# Altium PCB mainPCB.PcbDoc
Units mil, origin at the board's own origin, x right, y up, seen from the top; angles counter-clockwise.
Board outline 1968.5 x 3937.01 mil, 2 copper layers (Top Layer, Bottom Layer); 26 components, 22 nets, 73 pads, 0 vias.
Unrouted connection lines stored in the file: 2.
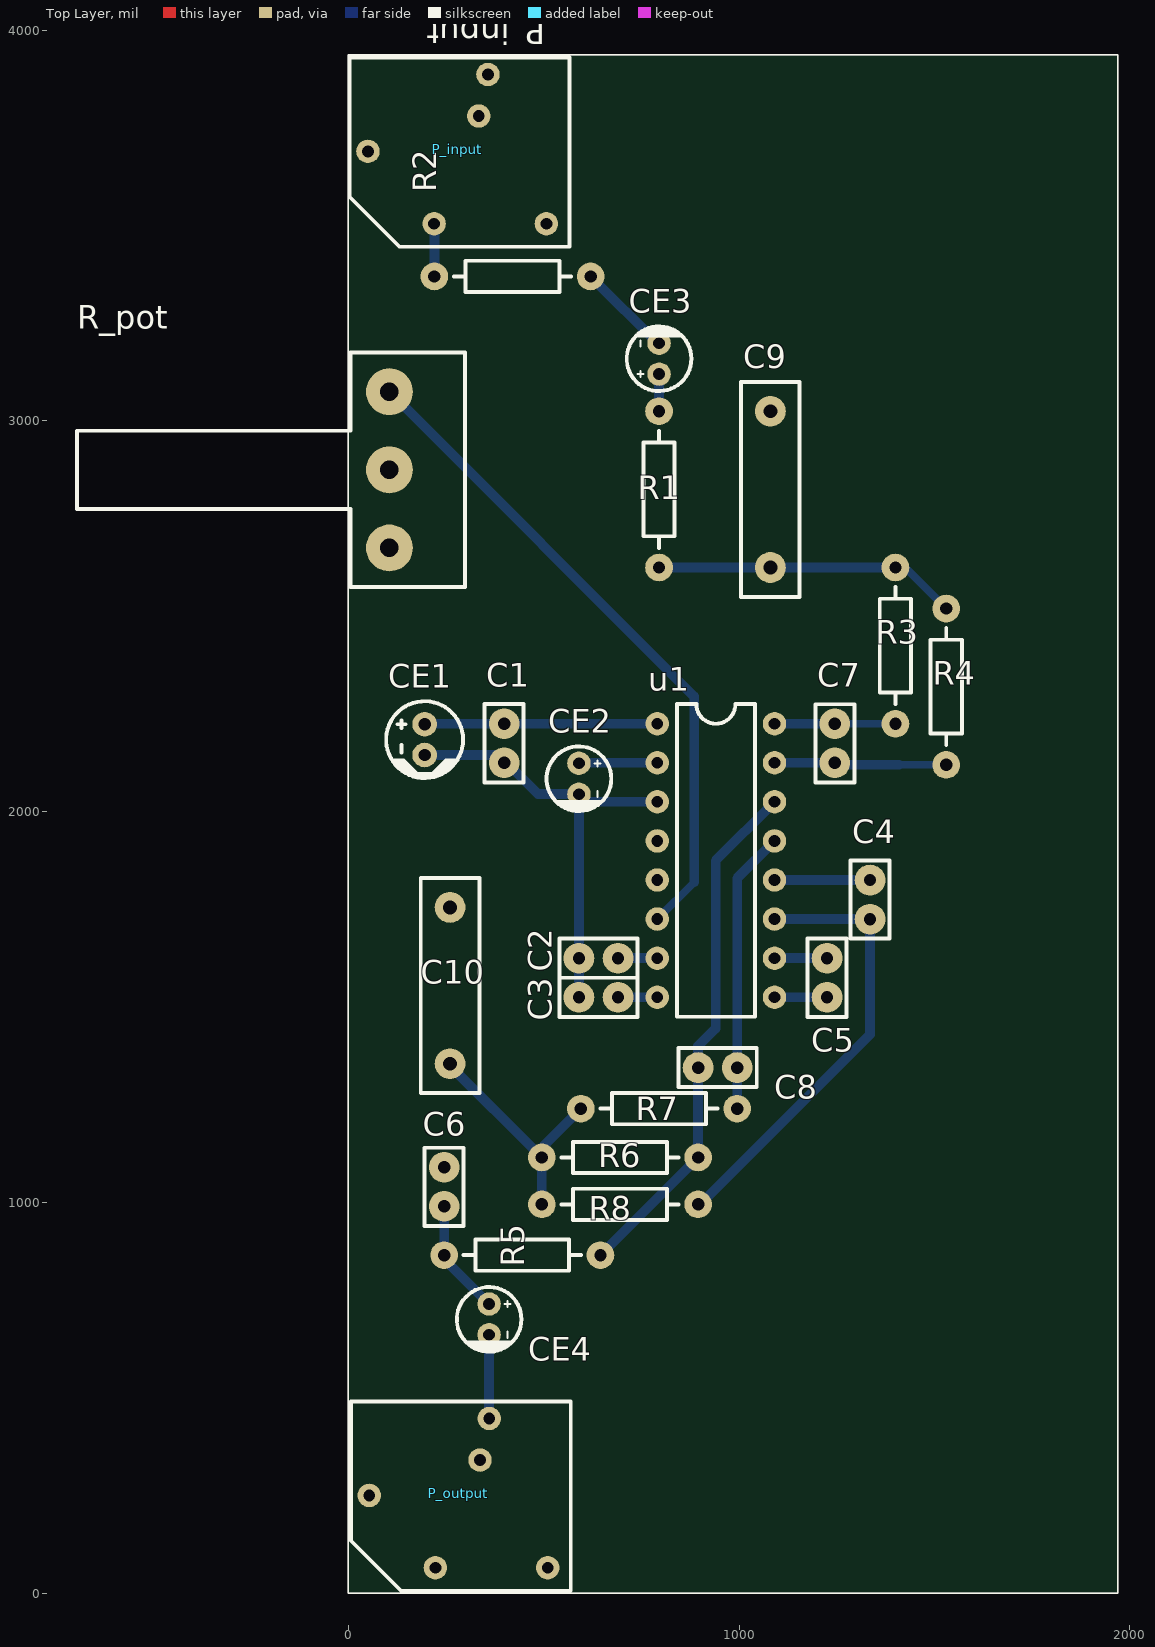
[diagram p0: Top Layer view]
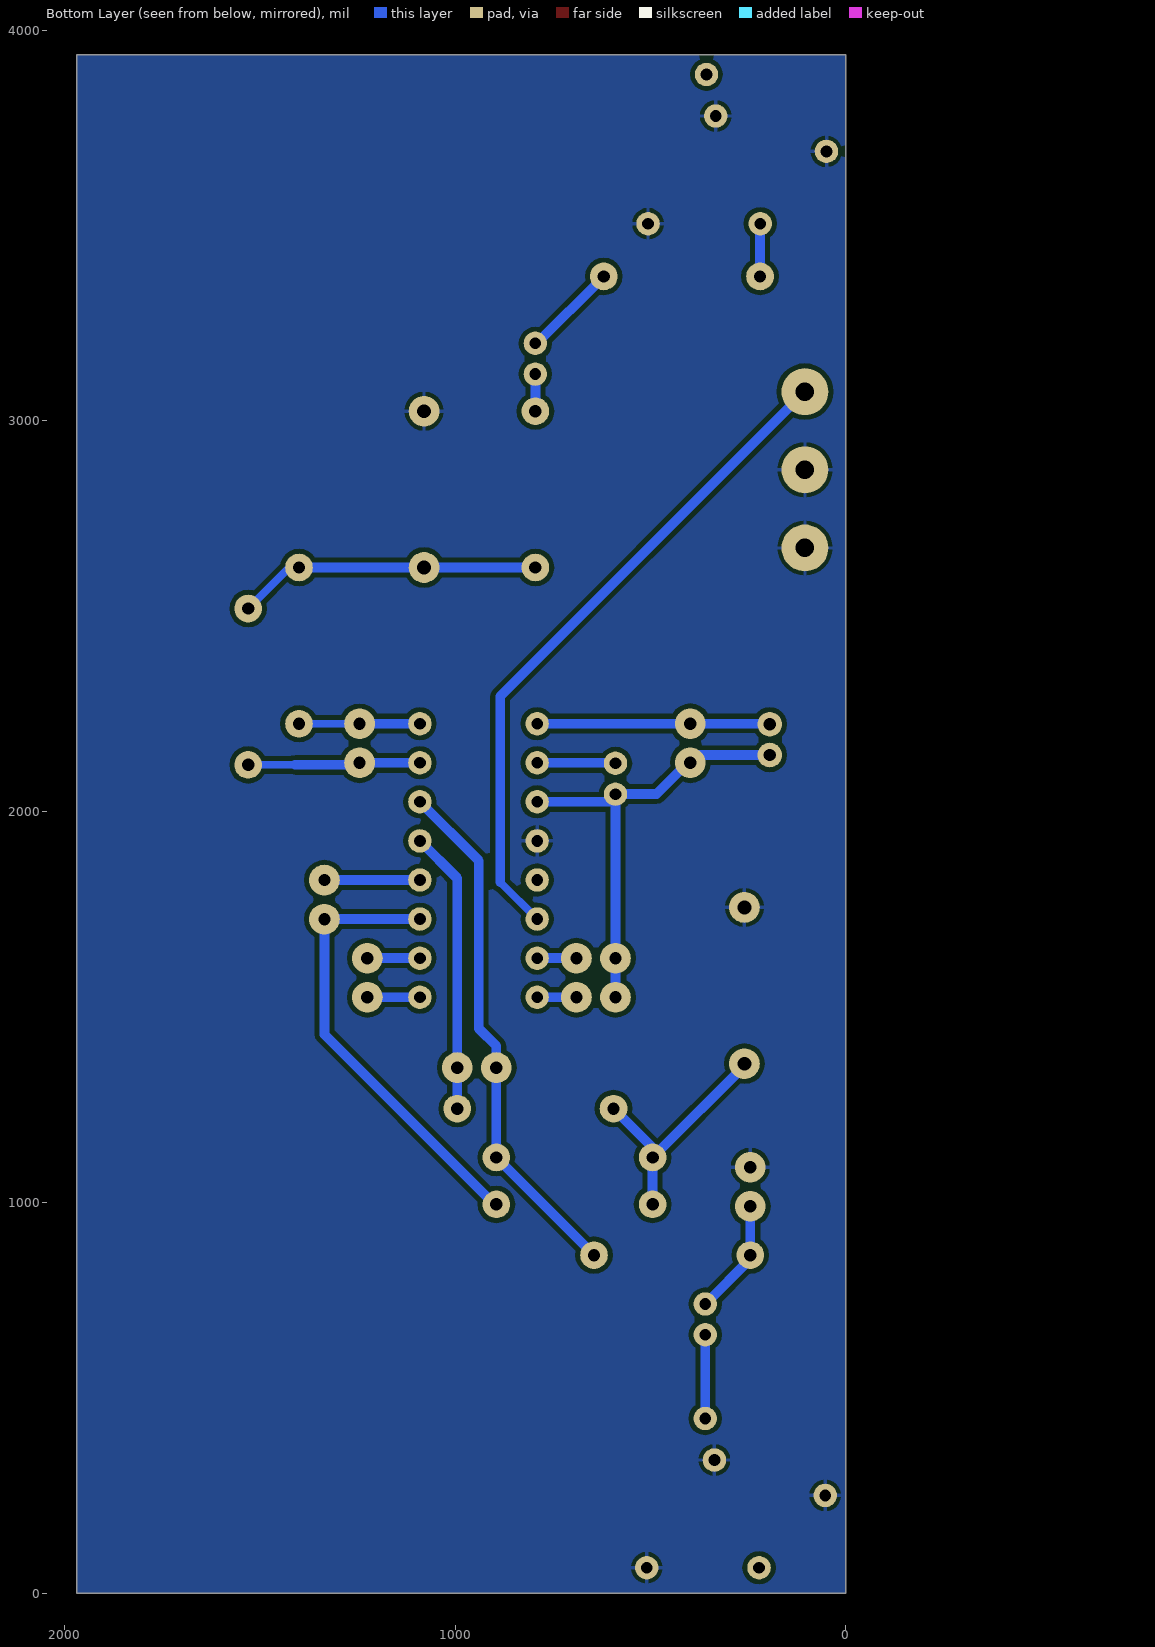
[diagram p1: Bottom Layer view, seen from below]
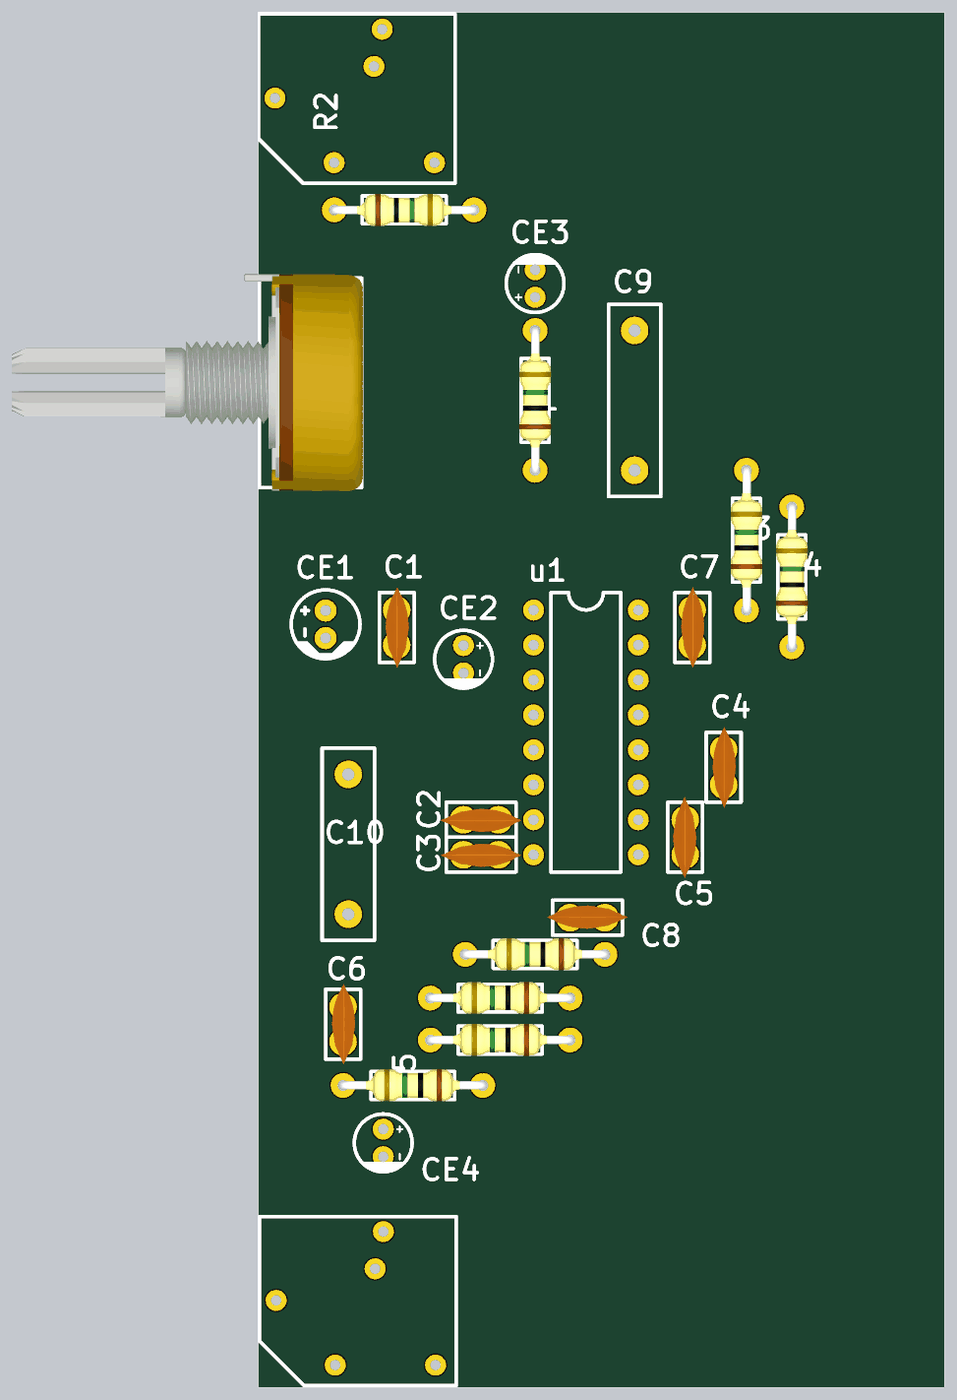
[diagram p2: 3D render of the assembled board from above, using the file's embedded part models]

## Layer stack, top to bottom
Top Solder: solder mask 0.4, Solder Resist, Dk 3.5
Top Layer: signal copper 1.4
Dielectric 1: dielectric 12.6, FR-4, Dk 4.8
Bottom Layer: signal copper 1.4
Bottom Solder: solder mask 0.4, Solder Resist, Dk 3.5

## Board outline
0,0 0,3937.01 1968.5,3937.01 1968.5,0

## Design rules (kind name [scope] priority, off if disabled: settings)
Clearance [All] p1: gap=12 ignorepadtopadclearanceinfootprint=FALSE
PolygonConnect [All] p1: connectstyle=Relief reliefconductorwidth=10 reliefentries=4 polygonreliefangle="90 Angle" airgapwidth=10
RoutingVias [All] p1: holewidth=28 width=50 viastyle="Through Hole" minholewidth=28 minwidth=50 maxholewidth=28 maxwidth=50
SolderMaskExpansion [All] p1: expansion=4
Width [All] p1: maxlimit=30 minlimit=10 preferedwidth=20
30 further rules are at their usual default settings.

## Components (designator, comment, footprint, x,y, rotation, side; value= is the part's Value field where it differs from the comment)
C1 "0.1uF" C100-200-100 398.54,2125.2 r90 top
C2 "0.1uF" C100-200-100 590,1625 r0 top
C3 "0.1uF" C100-200-100 590,1525 r0 top
C4 "0.1uF" C100-200-100 1335,1725 r90 top
C5 "0.1uF" C100-200-100 1225,1625 r270 top
C6 "0.1uF" C100-200-100 245,990 r90 top
C7 "560pF" C100-200-100 1245,2125 r90 top
C8 "560pF" C100-200-100 995,1345 r180 top
C9 "5600pF" C400-550-150 1080,2625 r90 top
C10 "5600pF" C400-550-150 260,1355 r90 top
CE1 "100uF" CP-RAD-5.0mm-15.0mm-2.0mm 195,2223.74 r270 top
CE2 "47uF" PCBComponent_1 590,2123.74 r270 top
CE3 "4.7uF" PCBComponent_1 795,3120 r90 top
CE4 "10uF" PCBComponent_1 360,740 r270 top
P_input "Alim" jack_p2_v1 506.69,3504.96 r90 top
P_output "Alim" jack_p2_v1 510,65 r90 top
R1 "15k" R400-2.0mm 795,2625 r90 top
R2 "100k" R400-2.0mm 220,3370 r0 top
R3 "10k" R400-2.0mm 1400,2225 r90 top
R4 "15k" R400-2.0mm 1530,2120 r90 top
R5 "2.7k" R400-2.0mm 645,865 r180 top
R6 "15k" R400-2.0mm 895,1115 r180 top
R7 "10k" R400-2.0mm 995,1240 r180 top
R8 "15k" R400-2.0mm 895,995 r180 top
R_pot "Value" POT 105,3075 r270 top
u1 "pt2399_dip16" dip16 790.55,2225.2 r0 top

## Footprints (in the part's own frame and the unit in brackets; to place one, negate y for a bottom-side part, rotate by r counter-clockwise, add the part's x,y. Pads: shape width x height; smd on the part's side, far side on the other; paste and mask are expansions set on the pad)
C100-200-100 [mm] "Radial Cap, Thru-Hole; 2 Leads; 0.1 in Pin Spacing"
  round 2 hole 0.8: 1(0,0) 2(2.54,0)
  silkscreen extent -1.27,-1.27 3.81,1.27, body extent -1.65,-0.89 4.19,0.81, height 6.22
C400-550-150 [mm] "Radial Cap, Thru-Hole; 2 Leads; 0.4 in Pin Spacing"
  round 2 hole 0.9: 1(0,0) 2(10.16,0)
  silkscreen extent -1.91,-1.91 12.06,1.91
CP-RAD-5.0mm-15.0mm-2.0mm [mm] "Radial Capacitor; D 5.0mm; L 15.0mm; P 2.0mm"
  round 1.6 hole 0.8: 1(0,0) 2(2,0)
  silkscreen extent -1.5,-2.5 3.5,2.5
dip16 [mil]
  round 60 hole 30: 1(0,0) 2(0,-100) 3(0,-200) 4(0,-300) 5(0,-400) 6(0,-500) 7(0,-600) 8(0,-700) 9(300,-700) 10(300,-600) 11(300,-500) 12(300,-400) 13(300,-300) 14(300,-200) 15(300,-100) 16(300,0)
  silkscreen extent 50,-750 250,50
jack_p2_v1 [mil]
  round 60 hole 30: 1(0,0) 1(185.04,456.69) 1(275.59,173.23) 2(0,287.4) 3(381.89,149.61)
  silkscreen extent -59,-59 425,504
PCBComponent_1 [mil]
  round 60 hole 30: 1(0,0) 2(78.74,0)
  silkscreen extent -43,-83 122,83
POT [mil] "Connector; Header; 3 Position"
  round 120 hole 47.24: 1(0,0) 2(200,0) 3(400,0)
  silkscreen extent -100,-800 500,193, body extent -111,-809 509,197, height 799
R400-2.0mm [mm] "Axial Device, Thru-Hole; 2 Leads; 0.4 in Pin Spacing"
  round 1.8 hole 0.8: 1(0,0) 2(10.16,0)
  silkscreen extent 1.27,-1.02 8.89,1.02, body extent -0.3,-1.17 10.46,1.14, height 2.93

## Part data
C1 C2 C3 C4 C5 C6 C7 C8 C9 C10: library part Capacitor, "Capacitor", Voltage="100 V", LatestRevisionDate=17-Jul-2002, LatestRevisionNote="Re-released for DXP Platform.", PackageReference=RAD-0.3, Published=8-Jun-2000, Publisher="Altium Limited"
CE1 CE2 CE3 CE4: library part Capacitor-Electrolytic, "Electrolytic Capacitor", Voltage="25 V"
P_input P_output: library part Jack_J4, "Jack J4"
R1 R2 R3 R4 R5 R6 R7 R8: library part Resistor, "Resistor", Power="1/4 W", Tolerance=5%, LatestRevisionDate=17-Jul-2002, LatestRevisionNote="Re-released for DXP Platform.", PackageReference=AXIAL-0.3, Published=8-Jun-2000, Publisher="Altium Limited"
R_pot: library part Potentiometer, "Potentiometer", Type=Lin

## Nets (pads, with @x,y where several pads share a name; then routed paths per layer and width w, separated by ;. In a path a pad name is that pad's centre, name@x,y a point inside that pad or via, vN(x,y) a via of type N, cw(c..) or ccw(c..) an arc to the next point about the centre after c; other vN are vias at no path point)
AGND: C1.1 C2.1 C3.1 CE1.2 CE2.2 u1.3 | length 1155.4
  Bottom Layer w20: CE2.2@590,2016.26 CE2.2@598.94,2025.2
  Bottom Layer w25: CE1.2 385,2145 485,2045 CE2.2 598.94,2036.06 598.94,2025.2 u1.3 ; C3.1 C2.1 CE2.2@590,2016.26
DGND: C6.2 C9.2 C10.2 P_input.1 P_output.1 R_pot.2 R_pot.3 u1.4 | length 0.3
  Bottom Layer w25: u1.4@790.35,1925 u1.4
NetC1_2: C1.2 CE1.1 u1.1 | length 596.2
  Bottom Layer w25: CE1.1 196.46,2225.2 C1.2 u1.1
NetC2_2: C2.2 u1.7 | length 100.9
  Bottom Layer w25: C2.2 690.2,1625.2 u1.7 u1.7@790.35,1625
NetC3_2: C3.2 u1.8 | length 100.6
  Bottom Layer w25: C3.2 690.2,1525.2 u1.8
NetC4_1: C4.1 R8.1 u1.11 | length 1161.8
  Bottom Layer w25: R8.1@895,990 1335,1430 1335,1724.8 1334.8,1725 1334.8,1725.2 u1.11
NetC4_2: C4.2 u1.12 | length 244.5
  Bottom Layer w25: u1.12 1334.8,1825.2 C4.2
NetC5_1: C5.1 u1.10 | length 134.5
  Bottom Layer w25: u1.10 1224.8,1625.2 C5.1
NetC5_2: C5.2 u1.9 | length 134.5
  Bottom Layer w25: u1.9 1224.8,1525.2 C5.2
NetC6_1: C6.1 CE4.1 R5.2 | length 297.6
  Bottom Layer w20: R5.2@245,855 R5.2
  Bottom Layer w25: R5.2@245,855 CE4.1 ; R5.2 C6.1
NetC7_1: C7.1 R4.1 u1.15 | length 441.6
  Bottom Layer w20: 1410,2120 R4.1
  Bottom Layer w25: u1.15 1244.8,2125.2 C7.1 1250,2120 1410,2120
NetC7_2: C7.2 R3.1 u1.16 | length 309.5
  Bottom Layer w20: C7.2 R3.1
  Bottom Layer w25: u1.16 1244.8,2225.2 C7.2
NetC8_1: C8.1 R7.1 u1.13 | length 724.8
  Bottom Layer w25: R7.1 C8.1 995,1829.65 u1.13
NetC8_2: C8.2 R5.1 R6.1 u1.14 | length 1344.8
  Bottom Layer w25: R5.1 R6.1 C8.2 895,1400 940,1445 940,1874.65 u1.14
NetC9_1: C9.1 R1.1 R3.2 R4.2 | length 768.5
  Bottom Layer w20: R3.2 1425,2625 R4.2
  Bottom Layer w25: R1.1@805,2625 C9.1 R3.2
NetC10_1: C10.1 R6.2 R7.2 R8.2 | length 652.9
  Bottom Layer w25: C10.1@250,1360 R6.2 ; R8.2 R6.2 ; R7.2@595,1260 R7.2 495,1140 R6.2
NetCE2_1: CE2.1 u1.2 | length 170.6
  Bottom Layer w25: 620,2125 790.35,2125 u1.2
NetCE3_1: CE3.1 R1.2 | length 95
  Bottom Layer w25: R1.2 CE3.1
NetCE3_2: CE3.2 R2.2 | length 234.7
  Bottom Layer w25: R2.2@635,3370 635,3355 780.63,3209.37 CE3.2@794.37,3209.37
NetCE4_2: CE4.2 P_output.2 P_output.3 | length 214.5
  Bottom Layer w20: P_output.3@360,447.28 P_output.3
  Bottom Layer w25: P_output.3@360,447.28 CE4.2
NetP_input_2: P_input.2 P_input.3 R2.1 | length 135.3
  Bottom Layer w20: P_input.2 P_input.2@220,3504.25
  Bottom Layer w25: R2.1 P_input.2@220,3504.25
NetR_pot_1: R_pot.1 u1.6 | length 1712
  Bottom Layer w20: u1.6 885,1819.65
  Bottom Layer w25: R_pot.1 885,2295 885,1819.65
pads on no net: u1.5

## Polygon pours and split planes (outlines as drawn)
DGND on Bottom Layer "Bottom Layer-No Net" (solid, pour order 0): 0,3937.01 1968.5,3937.01 1968.5,0 0,0

## Silkscreen, mask and mechanical layers (free items; w line width, h text height)
Top Overlay:
  the board outline again, w4